# Altium PCB CBU2ATK.PcbDoc
Units mil, origin at the board's own origin, x right, y up, seen from the top; angles counter-clockwise.
Board outline 6000 x 4000 mil, 2 copper layers (Top Layer, Bottom Layer); 7 components, 22 nets, 34 pads, 0 vias.
Unrouted connection lines stored in the file: 12.
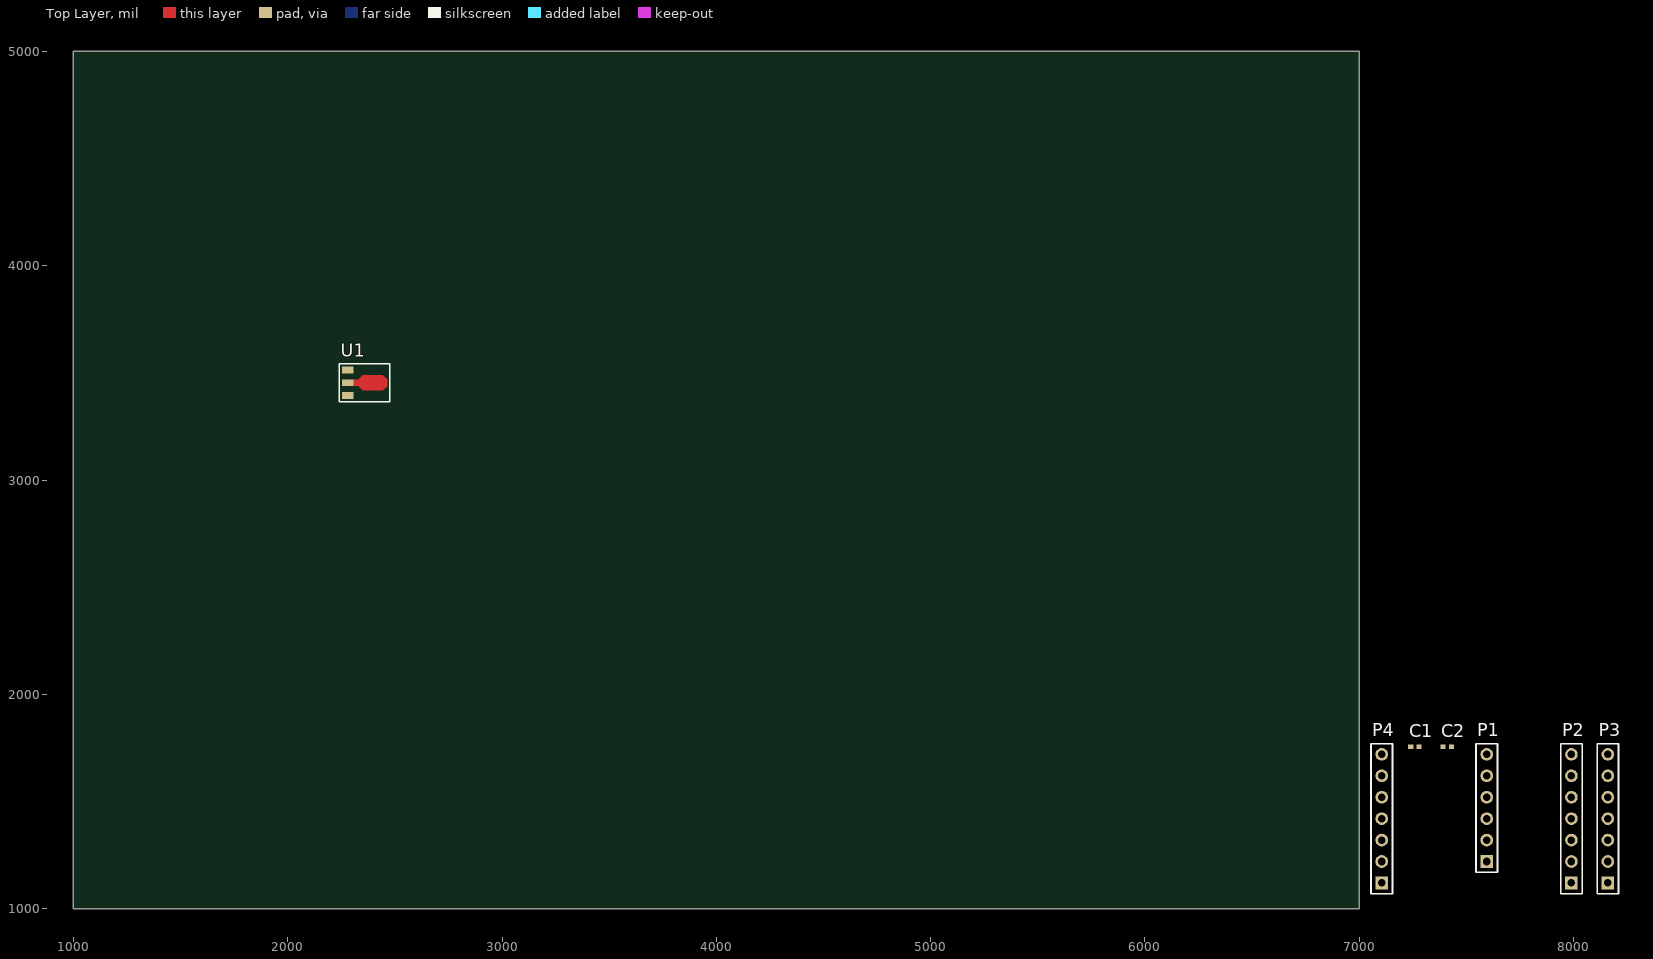
[diagram p0: Top Layer view]
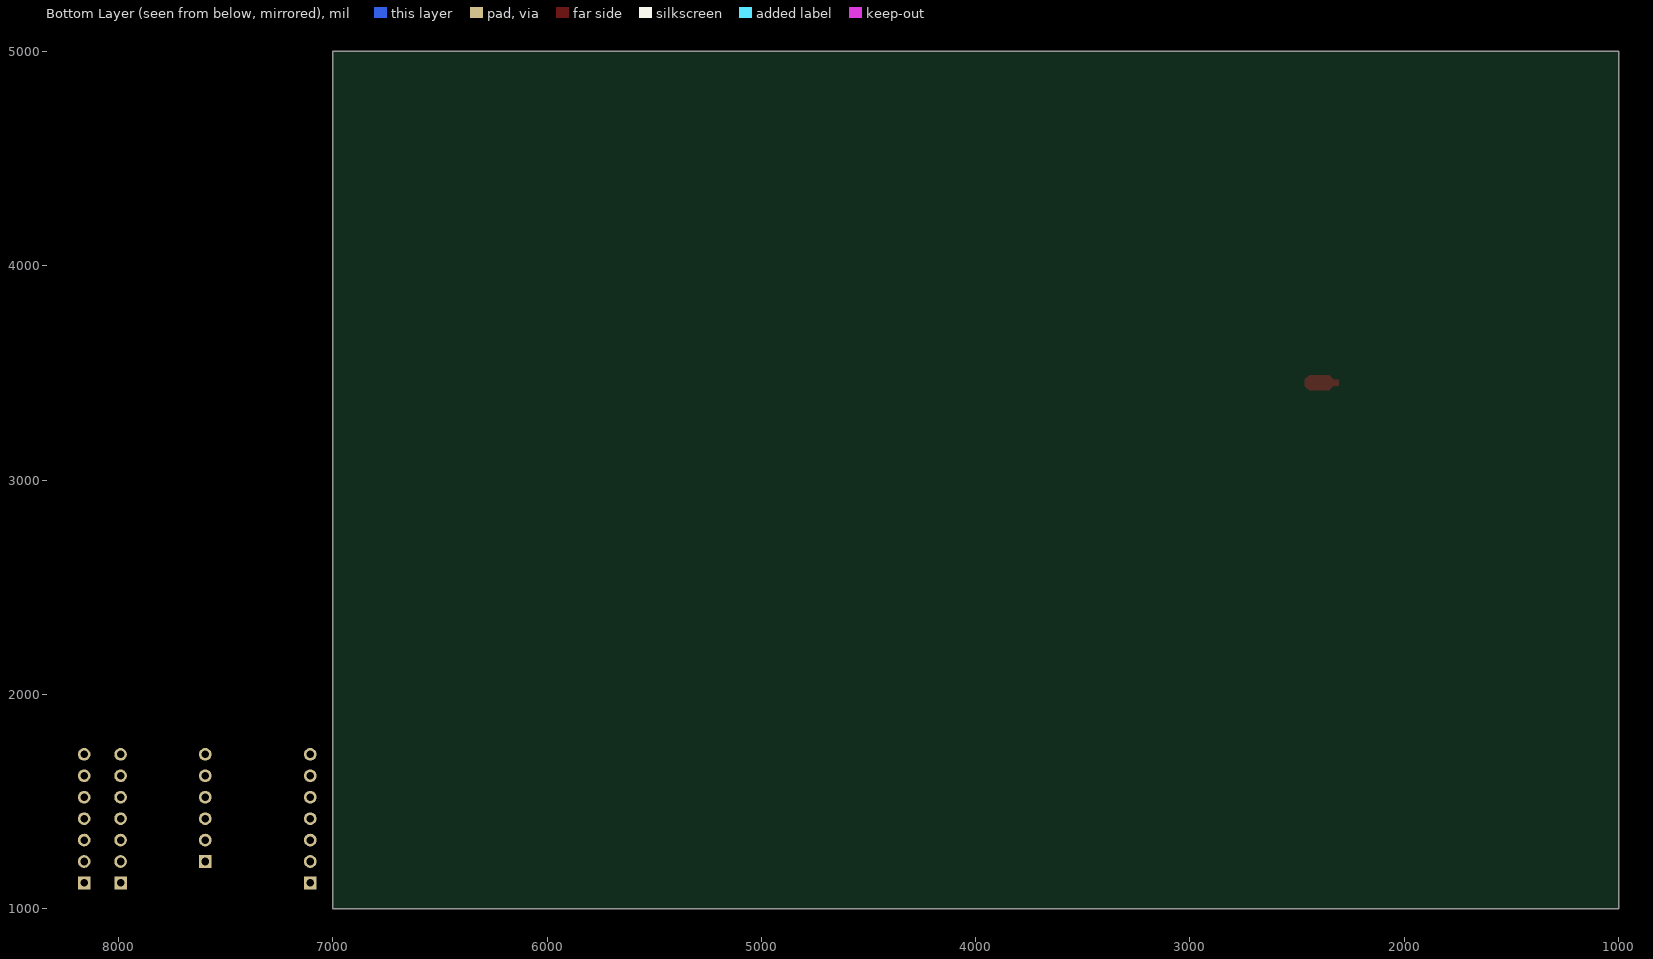
[diagram p1: Bottom Layer view, seen from below]

## Layer stack, top to bottom
Top Solder: solder mask 0.4, Solder Resist, Dk 3.5
Top Layer: signal copper 1.4
Dielectric 1: dielectric 12.6, FR-4, Dk 4.8
Bottom Layer: signal copper 1.4
Bottom Solder: solder mask 0.4, Solder Resist, Dk 3.5

## Board outline
1000,1000 7000,1000 7000,5000 1000,5000

## Design rules (kind name [scope] priority, off if disabled: settings)
Clearance [All] p1: gap=10 ignorepadtopadclearanceinfootprint=FALSE except(0: Arc-Hole Track-Hole SMDPad-Hole THPad-Hole Via-Hole Fill-Hole Poly-Hole Region-Hole Text-Hole)
PolygonConnect [All] p1: connectstyle=Relief reliefconductorwidth=10 reliefentries=4 polygonreliefangle="90 Angle" airgapwidth=10
RoutingVias [All] p1: holewidth=28 width=50 viastyle="Through Hole" minholewidth=28 minwidth=50 maxholewidth=28 maxwidth=50
SolderMaskExpansion [All] p1: expansion=4
Width [All] p1: maxlimit=10 minlimit=10 preferedwidth=10
30 further rules are at their usual default settings.

## Components (designator, comment, footprint, x,y, rotation, side; value= is the part's Value field where it differs from the comment)
C1 "Cap Semi" 0402 7260,1755 r0 top value=100uF
C2 "Cap Semi" 0402 7410,1755 r0 top value=100uF
P1 "Header 6" HDR1X6 7595,1220 r90 top
P2 "Header 7" HDR1X7 7990,1120 r90 top
P3 "Header 7" HDR1X7 8160,1120 r90 top
P4 "Header 7" HDR1X7 7105,1120 r90 top
U1 "AMS1117-3.3" SOT89 2280,3454.06 r270 top

## Footprints (in the part's own frame and the unit in brackets; to place one, negate y for a bottom-side part, rotate by r counter-clockwise, add the part's x,y. Pads: shape width x height; smd on the part's side, far side on the other; paste and mask are expansions set on the pad)
0402 [mm] "Chip Capacitor, Body 1.0x0.5mm, IPC High Density"
  rect 0.6x0.5 smd: 1(-0.5,0) 2(0.5,0)
  body extent -0.55,-0.3 0.55,0.3, height 1.3
HDR1X6 [mm] "Connector; Header; 6 Position"
  rect 1.5x1.5 hole 0.9: 1(0,0)
  round 1.5 hole 0.9: 2(2.54,0) 3(5.08,0) 4(7.62,0) 5(10.16,0) 6(12.7,0)
  silkscreen extent -1.27,-1.27 13.97,1.27
HDR1X7 [mm] "Connector; Header; 7 Position"
  rect 1.5x1.5 hole 0.9: 1(0,0)
  round 1.5 hole 0.9: 2(2.54,0) 3(5.08,0) 4(7.62,0) 5(10.16,0) 6(12.7,0) 7(15.24,0)
  silkscreen extent -1.27,-1.27 16.51,1.27
SOT89 [mm]
  rect 0.8x1.4 smd: 1(-1.5,0) 2(0,0) 3(1.5,0)
  Top Layer region: 0.402,3.702 0.9,4.2 0.4,4.7 -0.098,4.202
  Top Layer region: -0.398,3.698 0.102,4.198 -0.4,4.7 -0.9,4.2
  Top Layer region: -0.4,4.1 0.4,4.1 0.4,4.7 -0.4,4.7
  Top Layer region: -0.9,1.7 0.9,1.7 0.9,4.2 -0.9,4.2
  Top Layer region: 0,0.8 0.9,1.7 0,2.6 -0.9,1.7
  Top Layer region: -0.4,0.6 0.4,0.6 0.4,1.2 -0.4,1.2
  silkscreen extent -2.25,-1 2.25,5

## Part data
C1 C2: "Capacitor (Semiconductor SIM Model)", LatestRevisionDate=29-May-2009, LatestRevisionNote="IPC-7351 Footprint Added.", PackageDescription="Chip Capacitor", PackageReference=C1206, Published=8-Jun-2000, Publisher="Altium Limited"
P1: "Header, 6-Pin", LatestRevisionDate=17-Jul-2002, LatestRevisionNote="Re-released for DXP Platform.", Publisher="Altium Limited"
P2 P3 P4: "Header, 7-Pin", LatestRevisionDate=17-Jul-2002, LatestRevisionNote="Re-released for DXP Platform.", Publisher="Altium Limited"
U1: library part AMS1117

## Nets (pads, with @x,y where several pads share a name; then routed paths per layer and width w, separated by ;. In a path a pad name is that pad's centre, name@x,y a point inside that pad or via, vN(x,y) a via of type N, cw(c..) or ccw(c..) an arc to the next point about the centre after c; other vN are vias at no path point)
3V3: C2.2 P4.1 U1.2
ADC: P2.3
GND: C1.1 C2.1 P1.5 P4.2 U1.1
GPIO0: P1.1 P3.7
P6: P4.5
P7: P4.6
P8: P4.7
P9: P3.5
P14: P2.7
P16: P2.6
P17: P3.6
P20: P2.5
P22: P2.4
P24: P4.3
P26: P4.4
P28: P3.3
RST: P1.2 P3.4
RX2: P2.2
RXD_TTL: P1.3 P3.1
TX2: P2.1
TXD_TTL: P1.4 P3.2
VCC5: C1.2 P1.6 U1.3